# EAGLE board programer (EAGLE 9.0.1)

Size 160 x 100 mm. Coordinates in mm from the lower left corner, seen from the top.
Outline: 0,0 160,0 160,100 0,100 0,0
Copper layers (1*16): Top 0.035mm / dielectric 1.5mm / Bottom 0.035mm
Design rules "default": minimum track width 6mil, minimum drill 0.35mm, track to track 6mil, track to pad 6mil, pad to pad 6mil, via to via 6mil, smd to smd 6mil, copper to edge 40mil, drill to drill 6mil, minimum pad ring 10mil, minimum via ring 8mil, stop-mask expansion 4mil, vias tented up to drill 0mil, thermal gap 10mil

## Footprints (pad centres in the part's own frame; a part is rotated, then mirrored left to right if it is on the bottom)
JTAGICE3-50MIL = drill 0.432 pad 0.813: P0 -2.54,-0.635; P1 2.54,0.635; P2 2.54,-0.635; P3 1.27,0.635; P4 1.27,-0.635; P5 0,0.635; P6 0,-0.635; P7 -1.27,0.635; P8 -1.27,-0.635; P9 -2.54,0.635
FCC-10-PIN-0.5-PITCH = smd 0.2 x 1: P$1 1.25,0; P$2 1.75,0; P$3 2.25,0; P$4 2.75,0; P$5 3.25,0; P$6 3.75,0; P$7 4.25,0; P$8 4.75,0; P$9 5.25,0; P$10 5.75,0

## Placement (x,y rotation side)
U$1  JTAG-ICE-50MIL-SAM  [JTAGICE3-50MIL]  43.18,17.78 0 top
U$2  10-PIN-FCC  [FCC-10-PIN-0.5-PITCH]  39.37,29.21 0 top

## Library data of the parts
U$1 U$2 = CustomParts